# Altium PCB PCB1.PcbDoc
Units mil, origin at the board's own origin, x right, y up, seen from the top; angles counter-clockwise.
Board outline 2345 x 2215 mil, 2 copper layers (Top Layer, Bottom Layer); 42 components, 56 nets, 194 pads, 37 vias.
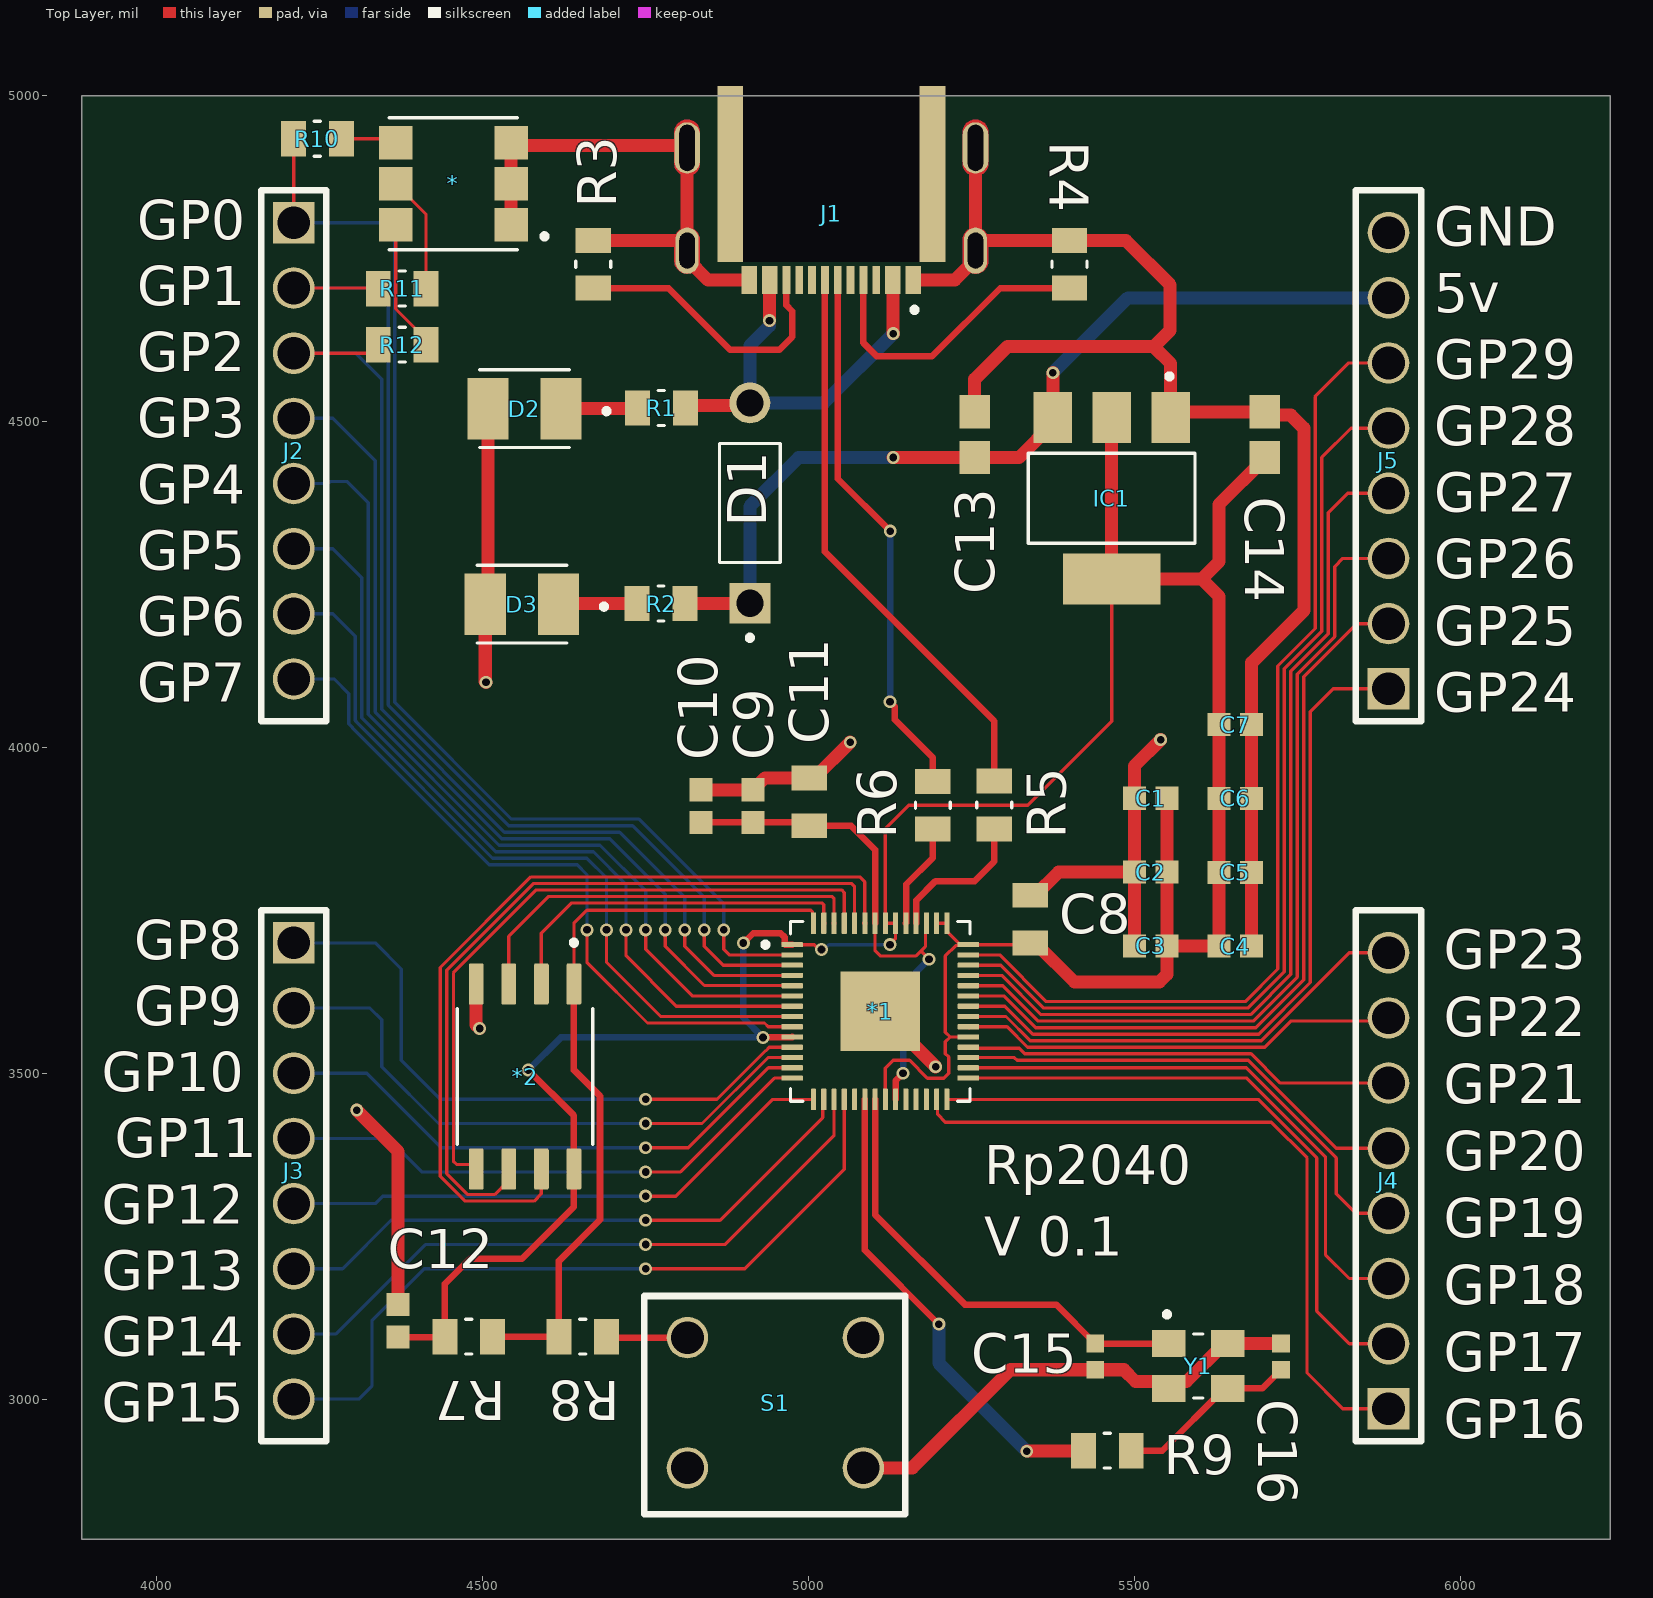
[diagram p0: Top Layer view]
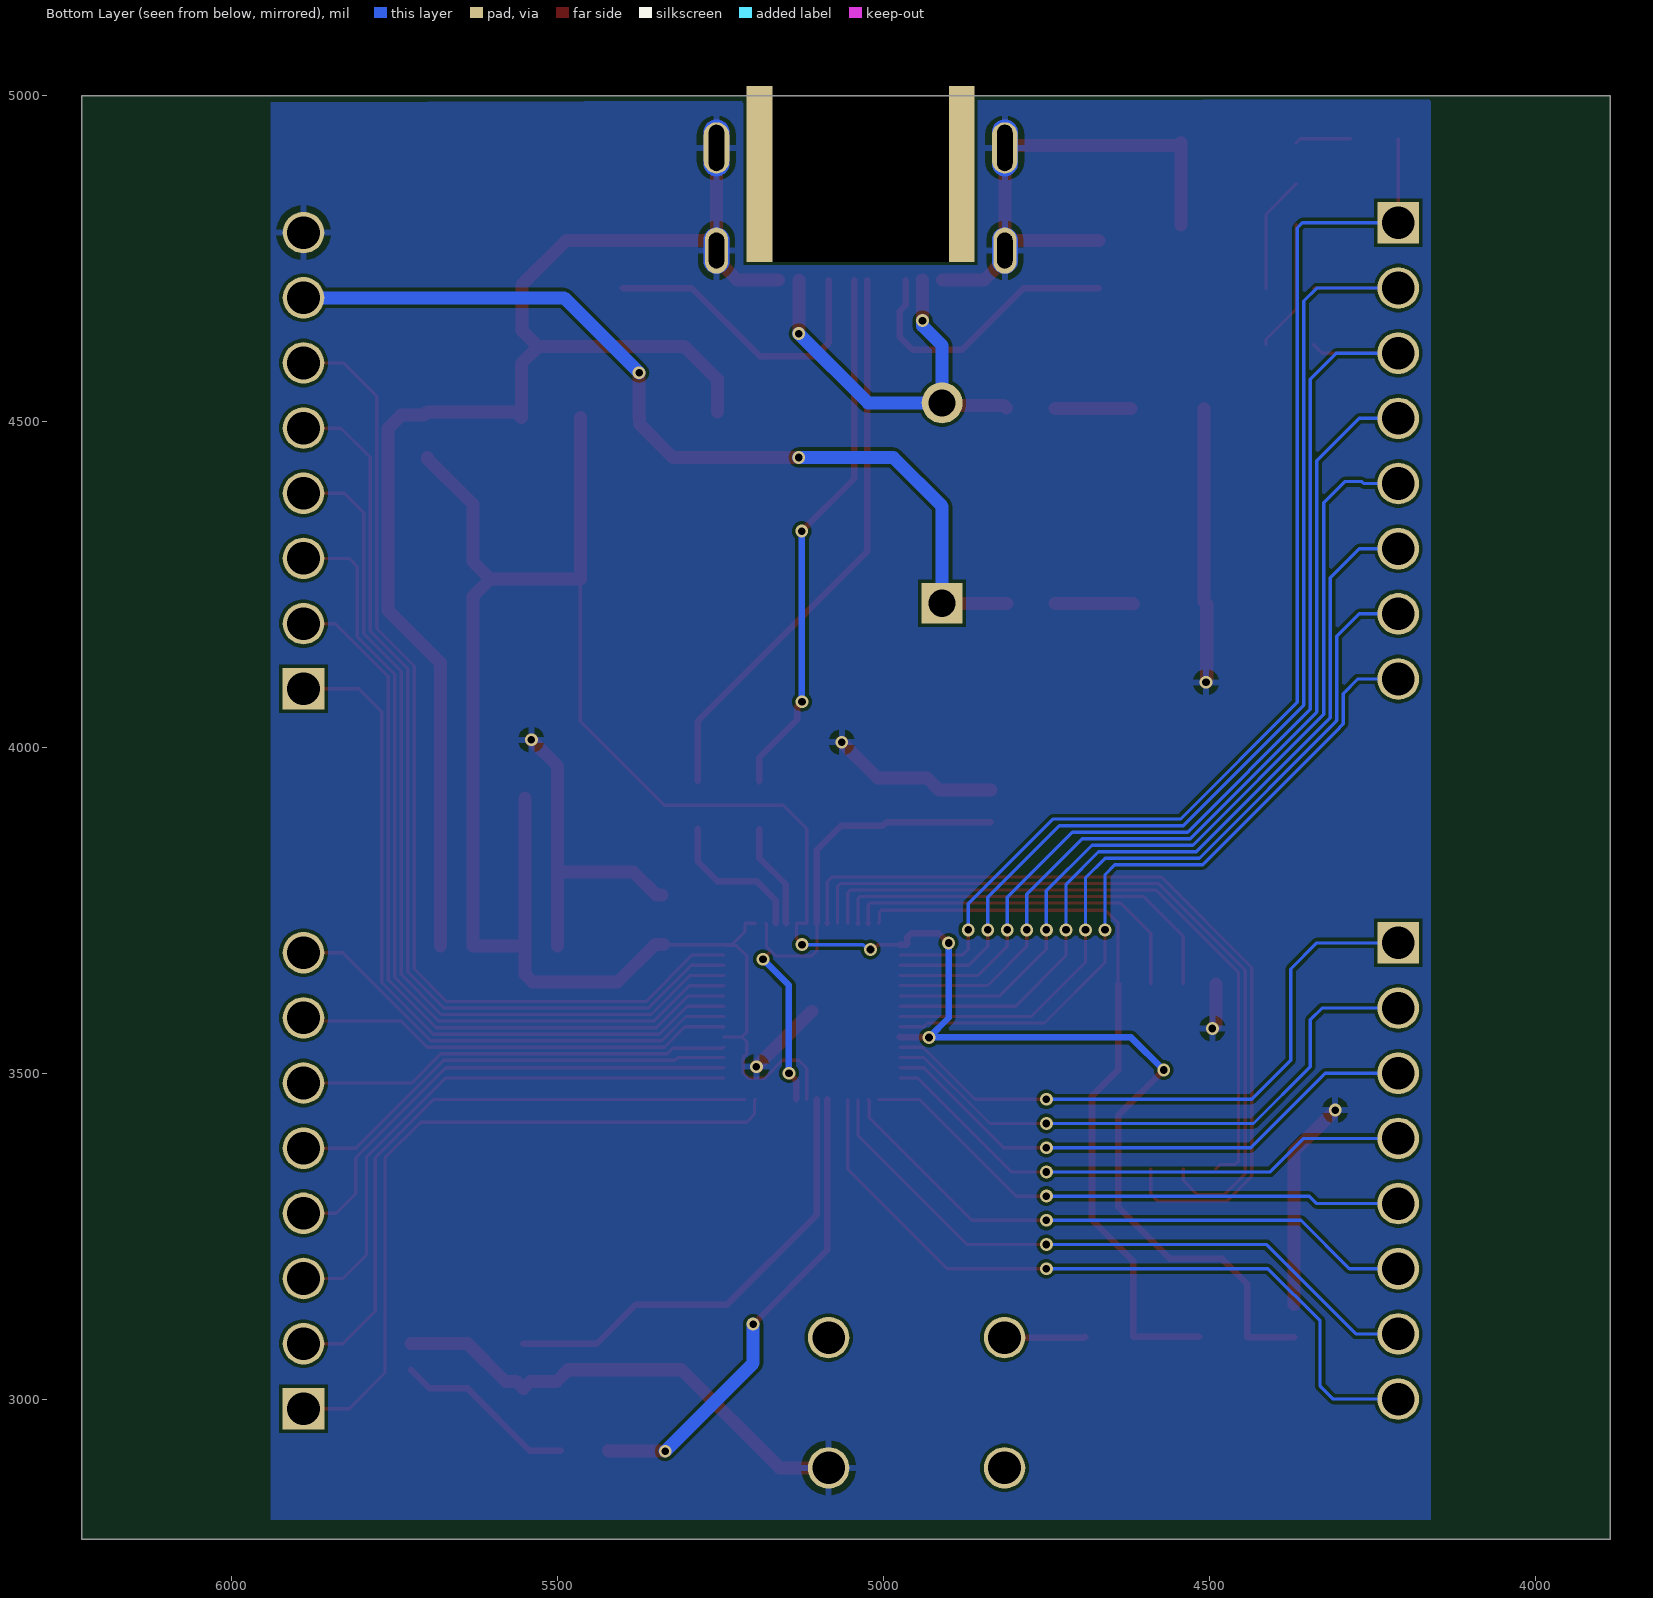
[diagram p1: Bottom Layer view, seen from below]
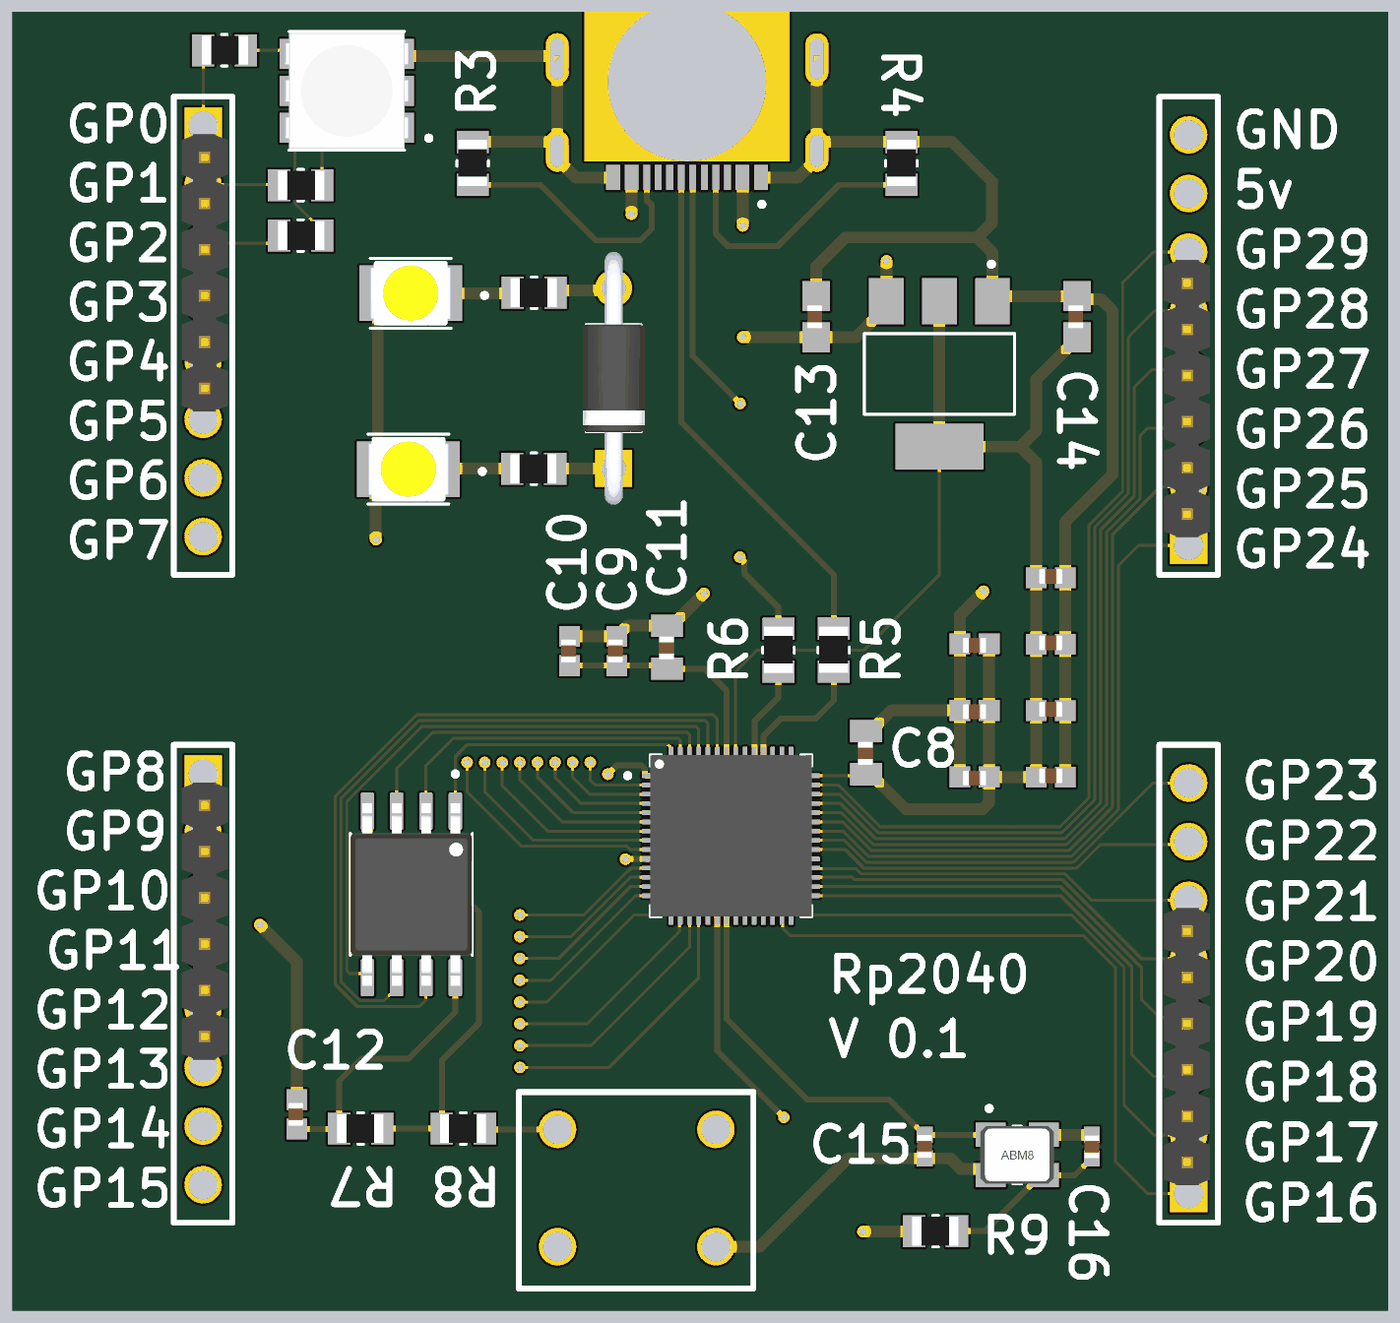
[diagram p2: 3D render of the assembled board from above, using the file's embedded part models]

## Layer stack, top to bottom
Top Solder: solder mask 0.4, Solder Resist, Dk 3.5
Top Layer: signal copper 1.4
Dielectric 1: dielectric 12.6, FR-4, Dk 4.8
Bottom Layer: signal copper 1.4
Bottom Solder: solder mask 0.4, Solder Resist, Dk 3.5

## Board outline
3885,2785 3885,5000 6230,5000 6230,2785

## Design rules (kind name [scope] priority, off if disabled: settings)
Clearance Clearance_1 [OnMid vs OnMid] p1: gap=5 ignorepadtopadclearanceinfootprint=FALSE sourcerule=38 cellrowname=All cellrowtype=0 cellcolname=All cellcoltype=0 innerlayers=TRUE
Clearance Clearance_2 [(ExistsOnLayer('Top Layer') Or ExistsOnLayer('Bottom Layer')) vs (ExistsOnLayer('Top Layer') Or ExistsOnLayer('Bottom Layer'))] p2: gap=5 ignorepadtopadclearanceinfootprint=FALSE sourcerule=38 cellrowname=All cellrowtype=0 cellcolname=All cellcoltype=0 outerlayers=TRUE
Clearance [All] p3: gap=10 ignorepadtopadclearanceinfootprint=FALSE ismatrix=TRUE
PolygonConnect [All] p1: connectstyle=Relief reliefconductorwidth=10 reliefentries=4 polygonreliefangle="90 Angle" airgapwidth=10
RoutingVias RoutingViaStyle_1 [All] p1: holewidth=10 width=19.68 viastyle="Through Hole" minholewidth=11.81 minwidth=19.68 maxholewidth=27.56 maxwidth=39.37
RoutingVias [All] p2: holewidth=28 width=50 viastyle="Through Hole" minholewidth=28 minwidth=50 maxholewidth=28 maxwidth=50
SolderMaskExpansion [All] p1: expansion=4 istentingtop=FALSE
Width MaxMinWidth_2 [All] p1: maxlimit=25 minlimit=5 preferedwidth=20 minimp=50.000000 maximp=50.000000 favimp=50.000000
Width [All] p2: maxlimit=10 minlimit=10 preferedwidth=10
30 further rules are at their usual default settings.

## Classes and differential pairs
component class Top: * J2 J3 J5 R10 R11 R12
component class U_USB: D1 D2 D3 J1 R1 R2 R3 R4
component class U_Power: C13 C14 IC1
component class U_Flash: *2 C12 R7 R8 S1
component class U_Crystal: C15 C16 R9 Y1
component class U_Rp2040: *1 C1 C2 C3 C4 C5 C6 C7 C8 C9 C10 C11 R5 R6

## Components (designator, comment, footprint, x,y, rotation, side; value= is the part's Value field where it differs from the comment)
* "SMD RGB LED" "SMD RGB LED-Footprint-1" 4450,4865 r180 top
*1 "RP2040" RP2040-Footprint-1 5110,3595 r0 top
*2 "W25Q128JVS" W25Q128JVS-Footprint-1 4560,3485 r270 top
C1 "SMD C100n" "SMD Capacetor-Footprint-1"#1 5525,3922.01 r180 top
C2 "SMD C100n" "SMD Capacetor-Footprint-1"#1 5525,3808.67 r180 top
C3 "SMD C100n" "SMD Capacetor-Footprint-1"#1 5525,3695.34 r180 top
C4 "SMD C100n" "SMD Capacetor-Footprint-1"#1 5655,3695 r0 top
C5 "SMD C100n" "SMD Capacetor-Footprint-1"#1 5655,3808.33 r0 top
C6 "SMD C100n" "SMD Capacetor-Footprint-1"#1 5655,3921.67 r0 top
C7 "SMD C100n" "SMD Capacetor-Footprint-1"#1 5655,4035 r0 top
C8 "SMD C1u" "SMD Capacetor-Footprint-1"#2 5339.18,3735.22 r90 top
C9 "SMD C100n" "SMD Capacetor-Footprint-1"#1 4915,3910 r90 top
C10 "SMD C100n" "SMD Capacetor-Footprint-1"#1 4835,3910 r90 top
C11 "SMD C1u" "SMD Capacetor-Footprint-1"#2 5000,3915 r90 top
C12 "SMD C100n" "SMD Capacetor-Footprint-1"#1 4370,3120 r90 top
C13 "SMD C10u" "SMD Capacetor-Footprint-1"#3 5255,4480 r90 top
C14 "SMD C10u" "SMD Capacetor-Footprint-1"#3 5700,4480 r90 top
C15 "SMD C15p" "SMD Capacetor-Footprint-1"#4 5440,3065 r90 top
C16 "SMD C15p" "SMD Capacetor-Footprint-1"#4 5725,3065 r270 top
D1 "Diode" Diode-Footprint-1 4905,4370 r90 top
D2 "SMD LED" "SMD LED-Footprint-1" 4563.9,4515 r180 top
D3 "SMD LED" "SMD LED-Footprint-1" 4560,4215 r180 top
IC1 "NCP1117" NCP1117-Footprint-1 5459.6,4400 r270 top
J1 "USB-C" USB-C-Footprint-1 5030,4890 r180 top
J2 "8 Pin Header" "8 Pin Header-Footprint-1" 4210.01,4305 r270 top
J3 "8 Pin Header" "8 Pin Header-Footprint-1" 4210,3200 r270 top
J4 "8 Pin Header" "8 Pin Header-Footprint-1" 5890,3485 r90 top locked
J5 "8 Pin Header" "8 Pin Header-Footprint-1" 5890,4590 r90 top
R1 "SMD Resistor" "SMD Resistor-Footprint-1" 4775.69,4520 r180 top
R2 "SMD Resistor" "SMD Resistor-Footprint-1" 4775,4220 r180 top
R3 "SMD Resistor" "SMD Resistor-Footprint-1" 4668.72,4740 r90 top
R4 "SMD Resistor" "SMD Resistor-Footprint-1" 5399.65,4740 r90 top
R5 "27" "SMD Resistor-Footprint-1" 5284.18,3910.22 r90 top
R6 "27" "SMD Resistor-Footprint-1" 5190,3910 r90 top
R7 "10k" "SMD Resistor-Footprint-1" 4480,3095 r180 top
R8 "10k" "SMD Resistor-Footprint-1" 4655,3095 r180 top
R9 "1K" "SMD Resistor-Footprint-1" 5460,2920 r180 top
R10 "SMD Resistor" "SMD Resistor-Footprint-1" 4245,4935 r0 top
R11 "SMD Resistor" "SMD Resistor-Footprint-1" 4375,4705 r0 top
R12 "SMD Resistor" "SMD Resistor-Footprint-1" 4375,4619.01 r0 top
S1 "Button Switch DIP" "Button Switch DIP -Footprint-1" 4960,3005 r270 top
Y1 "12Mhz Oscillator" "12Mhz Oscillator-Footprint-1" 5600,3055 r0 top

## Footprints (in the part's own frame and the unit in brackets; to place one, negate y for a bottom-side part, rotate by r counter-clockwise, add the part's x,y. Pads: shape width x height; smd on the part's side, far side on the other; paste and mask are expansions set on the pad)
"8 Pin Header-Footprint-1" [mm]
  rect 1.62x1.62 hole 1.27: 1(-12.7,0)
  round 1.62 hole 1.27: 2(-10.16,0) 3(-7.62,0) 4(-5.08,0) 5(-2.54,0) 6(0,0) 7(2.54,0) 8(5.08,0)
  silkscreen extent -13.97,-1.27 6.73,1.27, body extent -12.34,-0.94 -0.34,1.06, height 6
"12Mhz Oscillator-Footprint-1" [mm]
  rect 1.3x1.05 smd: 1(-1.205,0.766) 2(1.095,0.766) 3(1.095,-0.984) 4(-1.205,-0.984)
  silkscreen extent -1.37,-1.36 0.13,2, body extent -1.65,-1.36 1.55,1.14, height 0.8
"Button Switch DIP -Footprint-1" [mm]
  round 1.62 hole 1.27: 1(-2.27,3.155) 2(2.81,3.155) 3(-2.27,-3.703) 4(2.81,-3.703)
  silkscreen extent -3.89,-5.38 4.62,4.78, body extent -3.51,-5 4.24,4.4, height 6
Diode-Footprint-1 [mm]
  round 1.59 hole 1.06: A(4.032,-0.127)
  rect 1.59x1.59 / inner round 1.59 / far side rect 1.59x1.59 hole 1.06: K(-3.778,-0.127)
  silkscreen extent -5.22,-1.31 2.44,1.05, body extent -5.35,-1.47 5.6,1.22, height 2.69
NCP1117-Footprint-1 [mm]
  rect 2x1.5 smd: 1(-2.703,2.443) 2(-2.703,0.143) 3(-2.703,-2.157)
  rect 2x3.8 smd: 4(3.597,0.143)
  silkscreen extent -4.4,-3.11 2.2,3.39
RP2040-Footprint-1 [mm]
  rrect25% 0.84x0.2 smd: 1(-3.435,2.6) 2(-3.435,2.2) 3(-3.435,1.8) 4(-3.435,1.4) 5(-3.435,1) 6(-3.435,0.6) 7(-3.435,0.2) 8(-3.435,-0.2) 9(-3.435,-0.6) 10(-3.435,-1) 11(-3.435,-1.4) 12(-3.435,-1.8) 13(-3.435,-2.2) 14(-3.435,-2.6) 29(3.435,-2.6) 30(3.435,-2.2) 31(3.435,-1.8) 32(3.435,-1.4) 33(3.435,-1) 34(3.435,-0.6) 35(3.435,-0.2) 36(3.435,0.2) 37(3.435,0.6) 38(3.435,1) 39(3.435,1.4) 40(3.435,1.8) 41(3.435,2.2) 42(3.435,2.6)
  rrect25% 0.2x0.84 smd: 15(-2.6,-3.435) 16(-2.2,-3.435) 17(-1.8,-3.435) 18(-1.4,-3.435) 19(-1,-3.435) 20(-0.6,-3.435) 21(-0.2,-3.435) 22(0.2,-3.435) 23(0.6,-3.435) 24(1,-3.435) 25(1.4,-3.435) 26(1.8,-3.435) 27(2.2,-3.435) 28(2.6,-3.435) 43(2.6,3.435) 44(2.2,3.435) 45(1.8,3.435) 46(1.4,3.435) 47(1,3.435) 48(0.6,3.435) 49(0.2,3.435) 50(-0.2,3.435) 51(-0.6,3.435) 52(-1,3.435) 53(-1.4,3.435) 54(-1.8,3.435) 55(-2.2,3.435) 56(-2.6,3.435)
  rect 3.1x3.1 smd paste-0.57: 57(0,0)
  silkscreen extent -4.57,-3.5 3.5,3.5, body extent -3.5,-3.5 3.5,3.5, height 0.9
"SMD Capacetor-Footprint-1"#1 [mm]
  rect 0.9x0.9 smd: 1(-0.635,0) 2(0.635,0)
  body extent -0.5,-0.27 0.5,0.38, height 0.5
"SMD Capacetor-Footprint-1"#2 [mm]
  rect 0.97x1.38 smd: 1(-0.895,-0.021) 2(0.965,-0.021)
  body extent -0.49,-0.33 0.51,0.33, height 0.5
"SMD Capacetor-Footprint-1"#3 [mm]
  rect 1.3x1.2 smd: 1(-0.889,0) 2(0.889,0)
  body extent -0.5,-0.27 0.5,0.38, height 0.5
"SMD Capacetor-Footprint-1"#4 [mm]
  rect 0.7x0.7 smd: 1(-0.508,0) 2(0.508,0)
  body extent -0.49,-0.33 0.51,0.33, height 0.5
"SMD LED-Footprint-1" [mm]
  rect 1.6x2.4 smd: A(-1.425,-0.127) K(1.425,-0.127)
  silkscreen extent -3.3,-1.64 1.75,1.39, body extent -1.75,-1.53 1.75,1.27, height 1.9
"SMD Resistor-Footprint-1" [mm]
  rect 0.97x1.38 smd: 1(-0.895,-0.021) 2(0.965,-0.021)
  silkscreen extent -0.08,-0.7 0.16,0.66, body extent -0.95,-0.65 1.05,0.6, height 0.6
"SMD RGB LED-Footprint-1" [mm]
  rect 1.3x1.3 smd: 1(-2.377,1.6) 2(-2.377,0) 3(-2.377,-1.6) 4(2.123,-1.6) 5(2.123,0) 6(2.123,1.6)
  silkscreen extent -3.78,-2.57 2.37,2.57, body extent -2.83,-2.5 2.57,2.5, height 1.6
USB-C-Footprint-1 [mm]
  rect 0.6x1.1 smd: A1_B12(-3.327,4.388) A4_B9(-2.527,4.388) B1_A12(3.073,4.388) B4_A9(2.273,4.388)
  rect 0.3x1.1 smd: A5(-1.377,4.388) A6(-0.377,4.388) A7(0.123,4.388) A8(1.123,4.388) B5(1.623,4.388) B6(0.623,4.388) B7(-0.877,4.388) B8(-1.877,4.388)
  rect 8.89x6.858 hole 6.858 square unplated: None_01(-0.127,0.254)
  oval 1x2 hole 0.6 slot 1.8 at 90 deg mask+0: S1(-5.747,-0.762) S2(5.493,-0.762)
  oval 0.9x1.8 hole 0.6 slot 1.4 at 90 deg mask+0: S3(-5.747,3.238) S4(5.493,3.238)
  Top Layer region: -5.695,4.135 -5.643,4.127 -5.592,4.114 -5.544,4.095 -5.497,4.071 -5.453,4.043 -5.412,4.01 -5.375,3.973 -5.342,3.932 -5.314,3.888 -5.29,3.841 -5.271,3.793 -5.258,3.742 -5.25,3.69 -5.247,3.638 -5.247,2.838 -5.25,2.786 -5.258,2.734 -5.271,2.683 -5.29,2.635 -5.314,2.588 -5.342,2.544 -5.375,2.503 -5.412,2.466 -5.453,2.433 -5.497,2.405 -5.544,2.381 -5.592,2.362 -5.643,2.349 -5.695,2.341 -5.747,2.338 -5.799,2.341 -5.851,2.349 -5.902,2.362 -5.95,2.381 -5.997,2.405 -6.041,2.433 -6.082,2.466 -6.119,2.503 -6.152,2.544 -6.18,2.588 -6.204,2.635 -6.223,2.683 -6.236,2.734 -6.244,2.786 -6.247,2.838 -6.247,3.638 -6.244,3.69 -6.236,3.742 -6.223,3.793 -6.204,3.841 -6.18,3.888 -6.152,3.932 -6.119,3.973 -6.082,4.01 -6.041,4.043 -5.997,4.071 -5.95,4.095 -5.902,4.114 -5.851,4.127 -5.799,4.135 -5.747,4.138
  Top Layer region: -5.695,0.335 -5.643,0.327 -5.592,0.314 -5.544,0.295 -5.497,0.271 -5.453,0.243 -5.412,0.21 -5.375,0.173 -5.342,0.132 -5.314,0.088 -5.29,0.041 -5.271,-0.007 -5.258,-0.058 -5.25,-0.11 -5.247,-0.162 -5.247,-1.362 -5.25,-1.414 -5.258,-1.466 -5.271,-1.517 -5.29,-1.565 -5.314,-1.612 -5.342,-1.656 -5.375,-1.697 -5.412,-1.734 -5.453,-1.767 -5.497,-1.795 -5.544,-1.819 -5.592,-1.838 -5.643,-1.851 -5.695,-1.859 -5.747,-1.862 -5.799,-1.859 -5.851,-1.851 -5.902,-1.838 -5.95,-1.819 -5.997,-1.795 -6.041,-1.767 -6.082,-1.734 -6.119,-1.697 -6.152,-1.656 -6.18,-1.612 -6.204,-1.565 -6.223,-1.517 -6.236,-1.466 -6.244,-1.414 -6.247,-1.362 -6.247,-0.162 -6.244,-0.11 -6.236,-0.058 -6.223,-0.007 -6.204,0.041 -6.18,0.088 -6.152,0.132 -6.119,0.173 -6.082,0.21 -6.041,0.243 -5.997,0.271 -5.95,0.295 -5.902,0.314 -5.851,0.327 -5.799,0.335 -5.747,0.338
  Top Layer region: 5.545,4.135 5.597,4.127 5.648,4.114 5.696,4.095 5.743,4.071 5.787,4.043 5.828,4.01 5.865,3.973 5.898,3.932 5.926,3.888 5.95,3.841 5.969,3.793 5.982,3.742 5.99,3.69 5.993,3.638 5.993,2.838 5.99,2.786 5.982,2.734 5.969,2.683 5.95,2.635 5.926,2.588 5.898,2.544 5.865,2.503 5.828,2.466 5.787,2.433 5.743,2.405 5.696,2.381 5.648,2.362 5.597,2.349 5.545,2.341 5.493,2.338 5.441,2.341 5.389,2.349 5.338,2.362 5.29,2.381 5.243,2.405 5.199,2.433 5.158,2.466 5.121,2.503 5.088,2.544 5.06,2.588 5.036,2.635 5.017,2.683 5.004,2.734 4.996,2.786 4.993,2.838 4.993,3.638 4.996,3.69 5.004,3.742 5.017,3.793 5.036,3.841 5.06,3.888 5.088,3.932 5.121,3.973 5.158,4.01 5.199,4.043 5.243,4.071 5.29,4.095 5.338,4.114 5.389,4.127 5.441,4.135 5.493,4.138
  Top Layer region: 5.545,0.335 5.597,0.327 5.648,0.314 5.696,0.295 5.743,0.271 5.787,0.243 5.828,0.21 5.865,0.173 5.898,0.132 5.926,0.088 5.95,0.041 5.969,-0.007 5.982,-0.058 5.99,-0.11 5.993,-0.162 5.993,-1.362 5.99,-1.414 5.982,-1.466 5.969,-1.517 5.95,-1.565 5.926,-1.612 5.898,-1.656 5.865,-1.697 5.828,-1.734 5.787,-1.767 5.743,-1.795 5.696,-1.819 5.648,-1.838 5.597,-1.851 5.545,-1.859 5.493,-1.862 5.441,-1.859 5.389,-1.851 5.338,-1.838 5.29,-1.819 5.243,-1.795 5.199,-1.767 5.158,-1.734 5.121,-1.697 5.088,-1.656 5.06,-1.612 5.036,-1.565 5.017,-1.517 5.004,-1.466 4.996,-1.414 4.993,-1.362 4.993,-0.162 4.996,-0.11 5.004,-0.058 5.017,-0.007 5.036,0.041 5.06,0.088 5.088,0.132 5.121,0.173 5.158,0.21 5.199,0.243 5.243,0.271 5.29,0.295 5.338,0.314 5.389,0.327 5.441,0.335 5.493,0.338
  Bottom Layer region: -5.695,0.335 -5.643,0.327 -5.592,0.314 -5.544,0.295 -5.497,0.271 -5.453,0.243 -5.412,0.21 -5.375,0.173 -5.342,0.132 -5.314,0.088 -5.29,0.041 -5.271,-0.007 -5.258,-0.058 -5.25,-0.11 -5.247,-0.162 -5.247,-1.362 -5.25,-1.414 -5.258,-1.466 -5.271,-1.517 -5.29,-1.565 -5.314,-1.612 -5.342,-1.656 -5.375,-1.697 -5.412,-1.734 -5.453,-1.767 -5.497,-1.795 -5.544,-1.819 -5.592,-1.838 -5.643,-1.851 -5.695,-1.859 -5.747,-1.862 -5.799,-1.859 -5.851,-1.851 -5.902,-1.838 -5.95,-1.819 -5.997,-1.795 -6.041,-1.767 -6.082,-1.734 -6.119,-1.697 -6.152,-1.656 -6.18,-1.612 -6.204,-1.565 -6.223,-1.517 -6.236,-1.466 -6.244,-1.414 -6.247,-1.362 -6.247,-0.162 -6.244,-0.11 -6.236,-0.058 -6.223,-0.007 -6.204,0.041 -6.18,0.088 -6.152,0.132 -6.119,0.173 -6.082,0.21 -6.041,0.243 -5.997,0.271 -5.95,0.295 -5.902,0.314 -5.851,0.327 -5.799,0.335 -5.747,0.338
  Bottom Layer region: -5.695,4.135 -5.643,4.127 -5.592,4.114 -5.544,4.095 -5.497,4.071 -5.453,4.043 -5.412,4.01 -5.375,3.973 -5.342,3.932 -5.314,3.888 -5.29,3.841 -5.271,3.793 -5.258,3.742 -5.25,3.69 -5.247,3.638 -5.247,2.838 -5.25,2.786 -5.258,2.734 -5.271,2.683 -5.29,2.635 -5.314,2.588 -5.342,2.544 -5.375,2.503 -5.412,2.466 -5.453,2.433 -5.497,2.405 -5.544,2.381 -5.592,2.362 -5.643,2.349 -5.695,2.341 -5.747,2.338 -5.799,2.341 -5.851,2.349 -5.902,2.362 -5.95,2.381 -5.997,2.405 -6.041,2.433 -6.082,2.466 -6.119,2.503 -6.152,2.544 -6.18,2.588 -6.204,2.635 -6.223,2.683 -6.236,2.734 -6.244,2.786 -6.247,2.838 -6.247,3.638 -6.244,3.69 -6.236,3.742 -6.223,3.793 -6.204,3.841 -6.18,3.888 -6.152,3.932 -6.119,3.973 -6.082,4.01 -6.041,4.043 -5.997,4.071 -5.95,4.095 -5.902,4.114 -5.851,4.127 -5.799,4.135 -5.747,4.138
  Bottom Layer region: 5.545,4.135 5.597,4.127 5.648,4.114 5.696,4.095 5.743,4.071 5.787,4.043 5.828,4.01 5.865,3.973 5.898,3.932 5.926,3.888 5.95,3.841 5.969,3.793 5.982,3.742 5.99,3.69 5.993,3.638 5.993,2.838 5.99,2.786 5.982,2.734 5.969,2.683 5.95,2.635 5.926,2.588 5.898,2.544 5.865,2.503 5.828,2.466 5.787,2.433 5.743,2.405 5.696,2.381 5.648,2.362 5.597,2.349 5.545,2.341 5.493,2.338 5.441,2.341 5.389,2.349 5.338,2.362 5.29,2.381 5.243,2.405 5.199,2.433 5.158,2.466 5.121,2.503 5.088,2.544 5.06,2.588 5.036,2.635 5.017,2.683 5.004,2.734 4.996,2.786 4.993,2.838 4.993,3.638 4.996,3.69 5.004,3.742 5.017,3.793 5.036,3.841 5.06,3.888 5.088,3.932 5.121,3.973 5.158,4.01 5.199,4.043 5.243,4.071 5.29,4.095 5.338,4.114 5.389,4.127 5.441,4.135 5.493,4.138
  Bottom Layer region: 5.545,0.335 5.597,0.327 5.648,0.314 5.696,0.295 5.743,0.271 5.787,0.243 5.828,0.21 5.865,0.173 5.898,0.132 5.926,0.088 5.95,0.041 5.969,-0.007 5.982,-0.058 5.99,-0.11 5.993,-0.162 5.993,-1.362 5.99,-1.414 5.982,-1.466 5.969,-1.517 5.95,-1.565 5.926,-1.612 5.898,-1.656 5.865,-1.697 5.828,-1.734 5.787,-1.767 5.743,-1.795 5.696,-1.819 5.648,-1.838 5.597,-1.851 5.545,-1.859 5.493,-1.862 5.441,-1.859 5.389,-1.851 5.338,-1.838 5.29,-1.819 5.243,-1.795 5.199,-1.767 5.158,-1.734 5.121,-1.697 5.088,-1.656 5.06,-1.612 5.036,-1.565 5.017,-1.517 5.004,-1.466 4.996,-1.414 4.993,-1.362 4.993,-0.162 4.996,-0.11 5.004,-0.058 5.017,-0.007 5.036,0.041 5.06,0.088 5.088,0.132 5.121,0.173 5.158,0.21 5.199,0.243 5.243,0.271 5.29,0.295 5.338,0.314 5.389,0.327 5.441,0.335 5.493,0.338
  silkscreen extent -3.47,5.45 -3.27,5.65
W25Q128JVS-Footprint-1 [mm]
  rrect25% 1.61x0.58 smd: 1(-3.859,2.032) 2(-3.859,0.762) 3(-3.859,-0.508) 4(-3.859,-1.778) 5(3.351,-1.778) 6(3.351,-0.508) 7(3.351,0.762) 8(3.351,2.032)
  silkscreen extent -5.57,-2.51 2.39,2.77, body extent -4.2,-2.51 3.7,2.77, height 2.16

## Part data
*: library part CMP-00015-1
*1: library part CMP-00016-1, "Microprocessor"
*2: library part CMP-00021-1, "Flash Memory"
C1 C2 C3 C4 C5 C6 C7 C9 C10 C12: library part CMP-00017-4, "Generic SMD Capacetor"
C8 C11: library part CMP-00052-1, "Generic SMD Capacetor"
C13 C14: library part CMP-00053-1, "Generic SMD Capacetor"
C15 C16: library part CMP-00051-2, "Generic SMD Capacetor"
D1: library part CMP-00008-1, "Generic Diode"
D2 D3: library part CMP-00018-3, "Generic SMD LED"
IC1: library part CMP-00010-1, "Voltage Stabalizer"
J1: library part CMP-00020-5, "USB-C Connector"
J2 J3 J4 J5: library part CMP-00039-2, "8 Pin Breakout Header"
R1 R2 R3 R4 R7 R8: library part CMP-00019-2, "Generic SMD Resistor"
R5 R6 R9 R10 R11 R12: library part CMP-00019-4, "Generic SMD Resistor"
S1: library part CMP-00005-1, "4 Pin"
Y1: library part CMP-00003-1, "12 Mhz Oscillator SMD"

## Via types
v1: diameter 19.68, hole 11.81, Top Layer to Bottom Layer, 37 vias

## Nets (pads, with @x,y where several pads share a name; then routed paths per layer and width w, separated by ;. In a path a pad name is that pad's centre, name@x,y a point inside that pad or via, vN(x,y) a via of type N, cw(c..) or ccw(c..) an arc to the next point about the centre after c; other vN are vias at no path point)
1V1: *1.23 *1.45 *1.50 C9.1 C10.1 C11.1 | length 816.9
  Top Layer w5: *1.50 5102.13,3687.87 5110,3680 5165,3680 5172.21,3687.21 ; *1.45 5179.43,3728.8 5179.43,3694.43 5172.21,3687.21 ; v1(5185,3675) 5172.79,3687.21 5172.21,3687.21
  Top Layer w10: C10.1 C9.1 4995.6,3885 C11.1 5065.22,3879.78 5102.13,3842.87 *1.50 ; *1.23 5133.62,3488.62 v1(5145,3500)
  Bottom Layer w10: v1(5145,3500) 5145,3635 v1(5185,3675)
3V3: *1.1 *1.10 *1.22 *1.33 *1.42 *1.43 *1.44 *1.48 *1.49 *2.8 C1.1 C2.1 C3.1 C4.1 C5.1 C6.1 C7.1 C8.1 C12.1 C14.1 IC1.2 IC1.4 R7.2 | length 4668.4
  Top Layer w5: *1.1 5008.66,3697.36 5016.03,3690 v1(5020,3690) ; *1.22 5117.87,3507.87 5130,3520 5155,3520 5182.5,3492.5 5207.5,3492.5 5215,3500 5215,3525 5210,3530 5210,3548.33 5217.3,3555.63 ; v1(5125,3697.34) 5125,3698.43 5133.62,3707.05 *1.48 *1.49 5117.87,3875.46 5153.81,3911.39 5336.39,3911.39 5465.23,4040.23 IC1.4 ; *1.44 *1.43 5212.36,3717.64 5232.64,3697.36 *1.42 ; *1.33 5217.3,3555.63 ; C8.1@5337.36,3697.36 *1.42 ; 5217.3,3555.63 5210,3562.93 5210,3680 5225.93,3695.93 5243.8,3695.93 *1.42
  Top Layer w10: C12.1 4441.17,3095 R7.2 4441.99,3176.99 4480,3215 4560,3215 4640,3295 *2.8 4640,3435 v1(4570,3505) ; v1(4900,3700) 4915,3715 4957.13,3715 4963.23,3708.9 4963.23,3698.43 4964.29,3697.36 *1.1 ; v1(4930,3555) 4930.31,3555.31 4974.45,3555.31 *1.10
  Top Layer w20: C8.1@5337.36,3697.36 5350.71,3697.36 5408.07,3640 5538.28,3640 5550,3651.72 C3.1 ; IC1.2 IC1.4 5603.38,4258.38 ; C1.1 C2.1 C3.1 ; C14.1 5700,4443.03 5630,4373.03 5630,4285 5603.38,4258.38 ; C3.1 5550.17,3695.17 5629.83,3695.17 C4.1 C5.1 C6.1 C7.1 5630,4231.76 5603.38,4258.38
  Bottom Layer w5: v1(5020,3690) 5023.97,3690 5031.32,3697.34 v1(5125,3697.34)
  Bottom Layer w10: v1(4570,3505) 4620,3555 v1(4930,3555) 4900,3585 v1(4900,3700)
+5: C13.1 D1.K IC1.3 J5.7 R2.1 | length 1407
  Top Layer w20: R2.1 4909.54,4220.82 D1.K ; v1(5130,4445) C13.1 5323.11,4445 5374.67,4496.57 IC1.3 5375,4506.74 v1(5375,4575)
  Bottom Layer w20: D1.K 4910,4370 4985,4445 v1(5130,4445) ; v1(5375,4575) 5490,4690 J5.7
GND: *1.57 *2.4 *.1 *.2 *.3 C1.2 C2.2 C3.2 C4.2 C5.2 C6.2 C7.2 C8.2 C9.2 C10.2 C11.2 C12.2 C13.2 C14.2 C15.1 C16.1 D2.K D3.K IC1.1 J1.A1_B12 J1.B1_A12 J1.S1 J1.S2 J1.S3 J1.S4 J5.8 R3.2 R4.2 S1.2 Y1.2 Y1.4 | length 5500
  Top Layer w20: v1(4306.83,3443.45) 4370,3380.27 C12.2 ; *2.4 4490,3573.85 v1(4495.24,3568.6) ; v1(4505,4100) 4503.9,4101.1 D3.K 4507.8,4223.9 D2.K ; *.1 *.2 *.3 4547.58,4924 4809.74,4924 J1.S2 J1.S4@4813.74,4770.88 ; R3.2 4806.61,4778.01 J1.S4@4813.74,4770.88 ; C10.2 C9.2 4933.01,3953.01 C11.2 5008.89,3953.01 v1(5063.92,4008.04) ; J1.B1_A12 4845.48,4717.24 4813.74,4748.98 J1.S4 J1.S4@4813.74,4770.88 ; S1.2 5159.37,2894.37 5310,3045 C15.1 5483.78,3045 5501.84,3026.94 5541.9,3026.94 Y1.4 5563.24,3026.94 5579.97,3026.94 5638.2,3085.17 Y1.2 5643.2,3085.08 5724.92,3085.08 C16.1 ; *1.57 v1(5195,3510) ; J1.A1_B12 5224.52,4717.24 5256.26,4748.98 J1.S3 J1.S3@5256.26,4770.88 ; C13.2 5255,4565 5305,4615 5530,4615 ; J1.S1 J1.S3@5256.26,4770.88 ; C8.2 5348.07,3773.23 5383.52,3808.67 C2.2 ; C3.2 C2.2 ; v1(5540.37,4011.77) 5500,3971.4 C1.2 C2.2 ; C4.2 C5.2 C6.2 C7.2 5680,4130 5760,4210 5760,4490 5740,4510 5705,4510 C14.2 5564.37,4515 IC1.1 5555.78,4589.22 5530,4615 ; J1.S3@5256.26,4770.88 5263.39,4778.01 R4.2 5486.99,4778.01 5555,4710 5555,4640 5530,4615
GPIO0: *1.2 J2.1 R10.1 | length 1826.5
  Top Layer w5: R10.1 4210.01,4933.95 J2.1 ; v1(4870,3720) 4870,3690 4878.39,3681.61 *1.2
  Bottom Layer w5: J2.1 4357.07,4805 4364.93,4797.14 4364.93,4069.21 4544.14,3890 4740,3890 4870,3760 v1@4870,3720.27
GPIO1: *1.3 J2.2 R11.1 | length 1732.4
  Top Layer w5: J2.2 4338.96,4705 R11.1 ; v1(4840,3720) 4840,3695 4869.13,3665.87 *1.3
  Bottom Layer w5: J2.2 4335,4705 4354.93,4685.07 4354.93,4065.07 4540,3880 4730,3880 4840,3770 v1(4840,3720)
GPIO2: *1.4 J2.3 R12.1 | length 1636.3
  Top Layer w5: J2.3 4326.59,4605 R12.1 ; v1(4810,3720) 4810,3695 4854.88,3650.12 *1.4
  Bottom Layer w5: J2.3 4305,4605 4344.93,4565.07 4344.93,4058.36 4533.28,3870 4710,3870 4810,3770 v1(4810,3720)
GPIO3: *1.5 J2.4 | length 1398.3
  Top Layer w5: v1(4780,3720) 4780,3695 4840.31,3634.68 4974.45,3634.68 *1.5
  Bottom Layer w5: J2.4 4270,4505 4334.93,4440.07 4334.93,4054.21 4529.14,3860 4695,3860 4780,3775 v1(4780,3720)
GPIO4: *1.6 J2.5 | length 1336
  Top Layer w5: v1(4750,3720) 4750,3690 4821.38,3618.62 *1.6
  Bottom Layer w5: J2.5 4263.15,4405 4266.08,4407.93 4292.07,4407.93 4324.35,4375.65 4324.35,4050.65 4525,3850 4680,3850 4750,3780 v1(4750,3720)
GPIO5: *1.7 J2.6 | length 1246
  Top Layer w5: v1(4720,3720) 4720,3680 4797.13,3602.87 *1.7
  Bottom Layer w5: J2.6 4270,4305 4314.35,4260.65 4314.35,4045.65 4520,3840 4670,3840 4719.81,3790.19 4719.81,3720.19 v1(4720,3720)
GPIO6: *1.8 J2.7 | length 1173
  Top Layer w5: v1(4690,3720) 4690,3670 4772.87,3587.13 *1.8
  Bottom Layer w5: J2.7 4270,4205 4304.35,4170.65 4304.35,4041.5 4305,4040.86 4305,4040 4515,3830 4660,3830 4690,3800 v1(4690,3720)
GPIO7: *1.9 J2.8 | length 1092.4
  Top Layer w5: v1(4660,3720) 4660,3670 4752.87,3577.13 4932.4,3577.13 4938.15,3571.38 *1.9
  Bottom Layer w5: J2.8 4272.07,4105 4294.35,4082.72 4294.35,4036.5 4300,4030.86 4300,4030 4510,3820 4645,3820 4660,3805 v1(4660,3720)
GPIO8: *1.11 J3.1 | length 979.3
  Top Layer w5: v1(4750,3460) 4859.53,3460 4933.66,3534.13 4934.13,3534.13 4939.88,3539.88 *1.11
  Bottom Layer w5: J3.1 4335,3700 4375,3660 4375,3520 4435,3460 v1(4750,3460)
GPIO9: *1.12 J3.2 | length 922.3
  Top Layer w5: v1(4750,3422.86) 4836.53,3422.86 4937.8,3524.13 *1.12
  Bottom Layer w5: J3.2 4327.07,3600 4345,3582.07 4345,3510 4432.14,3422.86 v1(4750,3422.86)
GPIO10: *1.13 J3.3 | length 862.9
  Top Layer w5: v1(4750,3385.71) 4815.71,3385.71 4938.39,3508.39 *1.13
  Bottom Layer w5: J3.3 4322.07,3500 4436.36,3385.71 v1(4750,3385.71)
GPIO11: *1.14 J3.4 | length 845.7
  Top Layer w5: v1(4750,3348.57) 4803.57,3348.57 4947.64,3492.64 *1.14
  Bottom Layer w5: J3.4 4355,3400 4406.43,3348.57 v1(4750,3348.57)
GPIO12: *1.15 J3.5 | length 863.8
  Top Layer w5: v1(4750,3311.43) 4796.43,3311.43 4944.76,3459.76 *1.15
  Bottom Layer w5: J3.5 4335,3300 4346.43,3311.43 v1(4750,3311.43)
GPIO13: *1.16 J3.6 | length 936.4
  Top Layer w5: v1(4750,3274.29) 4864.29,3274.29 5021.95,3431.95 5021.95,3458.33 *1.16
  Bottom Layer w5: J3.6 4285,3200 4359.29,3274.29 v1(4750,3274.29)
GPIO14: *1.17 J3.7 | length 1010.5
  Top Layer w5: v1(4750,3237.14) 4871.73,3237.14 5039.13,3404.54 *1.17
  Bottom Layer w5: J3.7 4275,3100 4412.14,3237.14 v1(4750,3237.14)
GPIO15: *1.18 J3.8 | length 1156.5
  Top Layer w5: v1(4750,3200) 4902.03,3200 5054.88,3352.86 *1.18
  Bottom Layer w5: J3.8 4310,3000 4330,3020 4330,3120 4410,3200 v1(4750,3200)
GPIO16: *1.27 J4.1 | length 1095.9
  Top Layer w5: *1.27 5198.05,3458.33 5198.05,3436.95 5210,3425 5710,3425 5765,3370 5765,3040 5820,2985 J4.1
GPIO17: *1.28 J4.2 | length 970.5
  Top Layer w5: *1.28 5690.24,3459.76 5780,3370 5780,3135 5830,3085 J4.2
GPIO18: *1.29 J4.3 | length 860.1
  Top Layer w5: *1.29 5672.36,3492.64 5793.22,3371.78 5793.22,3221.78 5830,3185 J4.3
GPIO19: *1.30 J4.4 | length 769.5
  Top Layer w5: *1.30 5671.61,3508.39 5810,3370 5810,3315 5840,3285 J4.4
GPIO20: *1.31 J4.5 | length 702.4
  Top Layer w5: *1.31 5315.87,3524.13 5320,3520 5675,3520 5810,3385 J4.5
GPIO21: *1.32 J4.6 | length 667.5
  Top Layer w5: *1.32 5246.67,3538.44 5323.42,3538.44 5331.86,3530 5679.14,3530 5724.14,3485 J4.6
GPIO22: *1.34 J4.7 | length 678.4
  Top Layer w5: *1.34@5246.67,3569.94 *1.34 5304.63,3571.38 5336.01,3540 5700,3540 5740,3580 5885,3580 J4.7
GPIO23: *1.35 J4.8 | length 716.1
  Top Layer w5: *1.35 5303.02,3587.13 5340.15,3550 5694.85,3550 5829.85,3685 J4.8
GPIO24: *1.36 J5.1 | length 1125.6
  Top Layer w5: *1.36 5301.42,3602.87 5344.29,3560 5690.71,3560 5770,3639.29 5770,4055 5805,4090 J5.1
GPIO25: *1.37 J5.2 | length 1194.1
  Top Layer w5: *1.37 5299.81,3618.62 5348.43,3570 5686.57,3570 5760,3643.43 5760,4108.43 5841.57,4190 J5.2
GPIO26: *1.38 J5.3 | length 1296.7
  Top Layer w5: *1.38 5298.2,3634.37 5352.57,3580 5682.43,3580 5750,3647.57 5750,4112.57 5807.5,4170.07 5807.5,4277.5 5820,4290 J5.3
GPIO27: *1.39 J5.4 | length 1382.3
  Top Layer w5: *1.39 5296.6,3650.12 5356.72,3590 5678.28,3590 5740,3651.72 5740,4116.72 5797.5,4174.22 5797.5,4360 5827.5,4390 J5.4
GPIO28: *1.40 J5.5 | length 1469.3
  Top Layer w5: *1.40 5294.99,3665.87 5360.86,3600 5674.14,3600 5730,3655.86 5730,4120.86 5787.5,4178.36 5787.5,4445 5832.5,4490 J5.5
GPIO29: *1.41 J5.6 | length 1561.6
  Top Layer w5: *1.41 5293.39,3681.61 5365,3610 5670,3610 5720,3660 5720,4125 5777.5,4182.5 5777.5,4537.5 5777.07,4537.93 5829.14,4590 J5.6
Net*1_20: *1.20 R9.2 | length 730.1
  Top Layer w10: *1.20 5086.38,3228.62 v1(5200,3115)
  Top Layer w20: v1(5335,2920) 5335.41,2920.41 5421.58,2920.41 R9.2
  Bottom Layer w20: v1(5200,3115) 5200,3055 v1(5335,2920)
Net*1_21: *1.21 C15.2 Y1.1 | length 709.4
  Top Layer w10: *1.21 5102.13,3282.87 5240,3145 5380,3145 C15.2 5552.4,3085 Y1.1
Net*1_46: *1.46 R5.1 | length 229.6
  Top Layer w10: *1.46 5165.12,3765.12 5195,3795 5255,3795 5285,3825 R5.1
Net*1_47: *1.47 R6.1 | length 161.7
  Top Layer w10: *1.47 5150,3730.87 5150,3790 5190.82,3830.82 R6.1
Net*1_51: *1.51 *2.7 | length 1309.4
  Top Layer w5: *2.7 4590,3315 4578.88,3303.88 4473.01,3303.88 4435,3341.88 4435,3662.26 4574.06,3801.31 5078.69,3801.31 5086.38,3793.62 *1.51
  Top Layer w8: *1.51@5086.31,3730.3 *1.51
Net*1_52: *1.52 *2.6 | length 1185.9
  Top Layer w5: *2.6 4540,3335.62 4518.26,3313.88 4477.15,3313.88 4445,3346.03 4445,3658.12 4578.2,3791.31 5065.76,3791.31 5070.63,3786.44 *1.52
Net*1_53: *1.53 *2.5 | length 1030.2
  Top Layer w5: *2.5 4483.07,3360 4460,3360 4455,3365 4455,3653.97 4582.34,3781.31 5050.76,3781.31 5054.88,3777.19 *1.53
Net*1_54: *1.54 *2.3 | length 636.8
  Top Layer w5: *2.3 4540,3710 4601.31,3771.31 5035.76,3771.31 5039.13,3767.94 *1.54
  Top Layer w8: *1.54@5039.07,3730.3 *1.54
Net*1_55: *1.55 *2.2 | length 560.1
  Top Layer w5: *2.2 4590,3715 4636.31,3761.31 5020.46,3761.31 5023.39,3758.39 *1.55
  Top Layer w8: *1.55@5023.32,3730.3 *1.55
Net*1_56: *1.56 *2.1 R7.1 R8.2 | length 1171.7
  Top Layer w5: *2.1 4640,3730 4660,3750 5003.27,3750 5006.2,3747.07 5006.2,3731.67 *1.56
  Top Layer w10: R7.1 R8.2 4616.99,3211.99 4680,3275 4680,3465 4640,3505 *2.1
Net*_4: *.4 R10.2 | length 86
  Top Layer w5: R10.2 4360.23,4934.18 *.4
Net*_5: *.5 R11.2 | length 180.1
  Top Layer w5: *.5 4413.01,4818.41 R11.2
Net*_6: *.6 R12.2 | length 203.1
  Top Layer w5: *.6 4366.42,4672.85 4413.01,4626.26 R12.2
NetC16_2: C16.2 R9.1 Y1.3 | length 281.2
  Top Layer w10: R9.1 5542.74,2920.82 5638.2,3016.27 Y1.3 5696.27,3016.27 C16.2
NetD2_A: D2.A R1.2 | length 119.2
  Top Layer w10: D2.A D2.A@4620.82,4520.82
  Top Layer w12: R1.2@4736.87,4520 R1.2
  Top Layer w20: D2.A R1.2@4736.87,4520
NetD3_A: D3.A R2.2 | length 121.2
  Top Layer w20: D3.A 4616.92,4220.82 R2.2
NetJ1_A5: J1.A5 R4.1 | length 464.7
  Top Layer w10: J1.A5 5084.21,4620.79 5105,4600 5189.26,4600 5294.04,4704.78 R4.1
NetJ1_A6: J1.A6 R6.2 | length 830
  Top Layer w10: J1.A6 5044.84,4412.5 v1(5125.39,4331.95) ; v1(5125,4070) 5132.65,4062.35 5132.65,4042.35 5190.82,3984.18 R6.2
  Bottom Layer w10: v1(5125,4070) 5125.2,4070.2 5125.2,4331.75 v1(5125.39,4331.95)
NetJ1_A7: J1.A7 R5.2 | length 876.6
  Top Layer w10: J1.A7 5025.16,4300.36 5285,4040.51 R5.2
NetJ1_B5: J1.B5 R3.1 | length 443.9
  Top Layer w10: R3.1 4785.22,4704.78 4880,4610 4955,4610 4975,4630 4975,4669.5 4966.1,4678.4 J1.B5
NetR8_1: R8.1 S1.3 | length 124.6
  Top Layer w10: R8.1 4691.67,3094.37 S1.3
VBus: D1.A J1.A4_B9 J1.B4_A9 R1.1 | length 661.5
  Top Layer w20: R1.1 4814.87,4524.77 4906.05,4524.77 D1.A D1.A@4910,4540.25 ; v1(4940,4655) 4940.26,4655.26 4940.26,4716.99 J1.B4_A9 ; J1.A4_B9 5129.74,4716.99 5129.74,4635.26 v1(5130,4635)
  Bottom Layer w20: v1(4940,4655) 4940,4646.88 4910,4616.88 D1.A 5023.72,4528.72 v1(5130,4635)
pads on no net: *1.19 *1.24 *1.25 *1.26 J1.A8 J1.B6 J1.B7 J1.B8 J1.None_01 S1.1 S1.4

## Polygon pours and split planes (outlines as drawn)
GND on Bottom Layer "NONET_L-01_P-001" (solid, pour order 0): 4160,4995 4160,2815 5940,2815 5940,4990

## Silkscreen, mask and mechanical layers (free items; w line width, h text height)
Top Overlay:
  text "GP0" at 3970,4780 h60
  text "GND" at 5960,4770 h60
  text "GP1" at 3970,4678.57 h60
  text "5v" at 5960,4667.86 h60
  text "GP2" at 3970,4577.14 h60
  text "GP29" at 5960,4565.71 h60
  text "GP3" at 3970,4475.71 h60
  text "GP28" at 5960,4463.57 h60
  text "GP4" at 3970,4374.29 h60
  text "GP27" at 5960,4361.43 h60
  text "GP5" at 3970,4272.86 h60
  text "GP26" at 5960,4259.29 h60
  text "GP6" at 3970,4171.43 h60
  text "GP25" at 5960,4157.14 h60
  text "GP7" at 3970,4070 h60
  text "GP24" at 5960,4055 h60
  text "GP8" at 3964.98,3675 h60
  text "GP23" at 5975,3660 h60
  text "GP9" at 3964.98,3573.57 h60
  text "GP22" at 5975,3557.14 h60
  text "GP10" at 3915,3472.14 h60
  text "GP21" at 5975,3454.29 h60
  text "GP11" at 3934.99,3370.71 h60
  text "GP20" at 5975,3351.43 h60
  text "Rp2040" at 5270,3329.99 h60
  text "GP12" at 3915,3269.29 h60
  text "GP19" at 5975,3248.57 h60
  text "V 0.1" at 5270,3220 h60
  text "GP13" at 3915,3167.86 h60
  text "GP18" at 5975,3145.71 h60
  text "GP14" at 3915,3066.43 h60
  text "GP17" at 5975,3042.86 h60
  text "GP15" at 3915,2965 h60
  text "GP16" at 5975,2940 h60